# Altium PCB Control_Board_Model_C201_FFC_Sens_Conn.PcbDoc (part 8 of 12)
Units mil, origin at the board's own origin, x right, y up, seen from the top; angles counter-clockwise.
Board outline 3937.01 x 2755.91 mil, 6 copper layers (1-SIG-TOP, 2-GND, 3-PWR, 4-SIG-HOR, 5-SIG-VERT, 6-GND-BOT), stack 46.063 mil thick; 497 components, 379 nets, 1804 pads, 1610 vias.
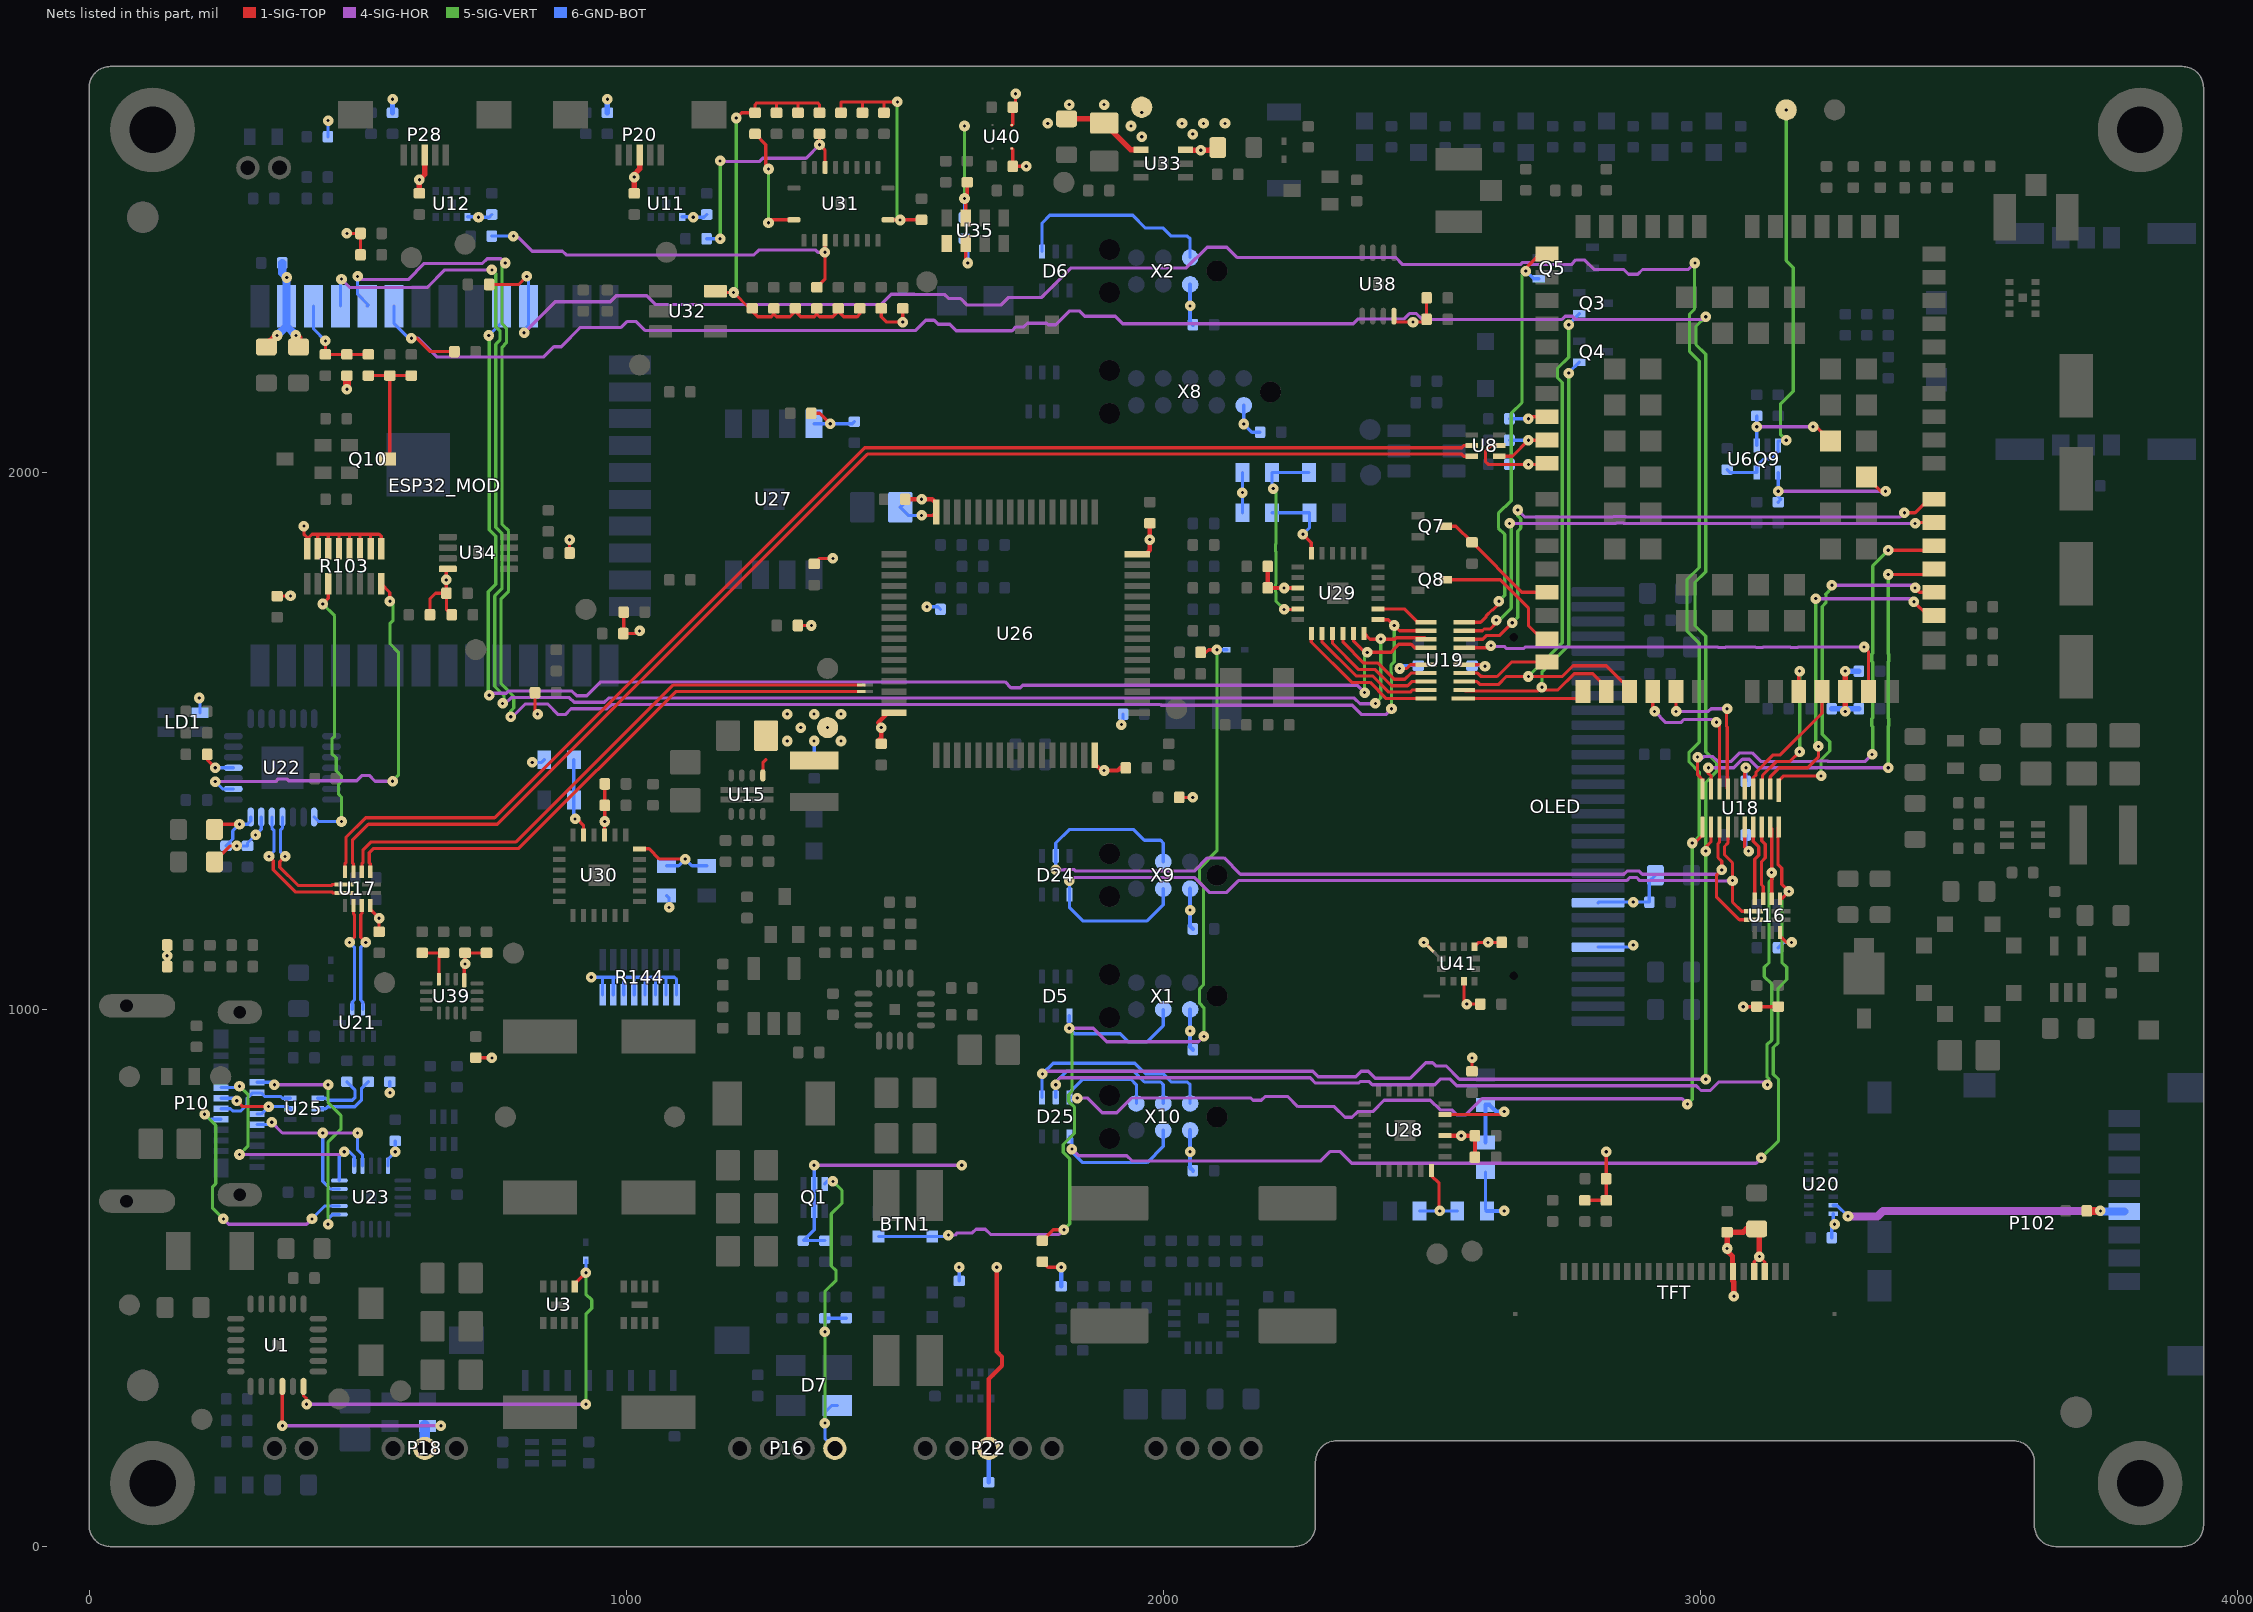
[diagram p8: the nets of this part, all layers, seen from the top]

## Part data (continued)
U13: library part "IC STSPIN220 MOTOR DRVR BIPOLAR 0-5V 16FPN", "Bipolar Motor Driver Power MOSFET Step/Direction 16-VFQFPN (3x3)", Manufacturer=STMicroelectronics, Max Operating Temperature=150°C, Min Operating Temperature=-40°C, Output Current=1.3A, Supplier Part Number 1=497-16602-1-ND, ComponentLink1Description=http://www.st.com/content/ccc/resource/technical/document/datasheet/group3/42/7e/5c/90/70/ef/47/95/DM00291865/files/DM00291865.pdf/jcr:content/translations/en.DM00291865.pdf?src-supplier=Digi-Key, ComponentLink1URL=http://www.st.com/content/ccc/resource/technical/document/datasheet/group3/42/7e/5c/90/70/ef/47/95/DM00291865/files/DM00291865.pdf/jcr:content/translations/en.DM00291865.pdf?src-supplier=Digi-Key, ComponentLink2Description=http://www.farnell.com/datasheets/2815804.pdf?src-supplier=Newark, ComponentLink2URL=http://www.farnell.com/datasheets/2815804.pdf?src-supplier=Newark, ComponentLink3Description=http://www.farnell.com/datasheets/2815804.pdf?src-supplier=Farnell, ComponentLink3URL=http://www.farnell.com/datasheets/2815804.pdf?src-supplier=Farnell, Logic Function=AND, Manufacturer Part Number=STSPIN220, Mount="Surface Mount", Packaging="Cut Tape", Pricing 1="1=1.62, 10=1.458, 25=1.3752, 100=1.1, 250=0.9625, 500=0.935, 1000=0.7425 (USD)", Stock 1=3586, Supplier 1=Digi-Key
U14: library part "IC TPS61023DRLT REG BOOST ADJ 3A SOT563", "Boost Switching Regulator IC Positive Adjustable 2.2V 1 Output 3A SOT-563, SOT-666", Input Voltage="0.5 V to 5.5 V", Input Voltage MAX="5.5 V", Input Voltage MIN="0.5 V", Manufacturer="Texas Instruments", Maximum Operating Temperature="+ 125 C", Minimum Operating Temperature="- 40 C", Output Current="3.7 A", Output Voltage="2.2 V to 5.5 V", Package / Case=SOT-5X3-6, Quiescent Current="0.9 uA", Supplier Part Number 1=595-TPS61023DRLT, Switching Frequency="1 MHz", Brand="Texas Instruments", Category="Switching Voltage Regulators", Development Kit=TPS61023EVM-052, Height="0.55 mm", Length="1.6 mm", Manufacturer Part Number=TPS61023DRLT, Minimum Order Quantity=1, Mount="Surface Mount", Mounting Style=SMD/SMT, Number of Outputs="1 Output", Packaging="Cut Tape", Pricing 1="1=1.07, 10=0.902, 100=0.693, 250=0.612, 500=0.580, 1000=0.451, 2500=0.429, 5000=0.413, 10000=0.400 (USD)", Product Status="New Product", Product Type="Switching Voltage Regulators", Reeling=True, RoHS="RoHS Compliant", RoHS - Mouser=Y, Series=TPS61023, Shutdown=Shutdown, Standard Pack Qty=250, Stock 1=196, Subcategory="PMIC - Power Management ICs", Supplier 1=Mouser, Supplier 2=Digi-Key, Supplier Part Number 2=296-TPS61023DRLTCT-ND, Supply Voltage - Min="0.5 V", Topology=Boost, Width="1.2 mm"
U15: library part "IC TPS6209733 REG BUCK FIXED 3.3V 2A 11VQFN", "Buck Switching Regulator IC Positive Fixed 3.3V 1 Output 2A 11-VFQFN", Case/Package=VQFN, Manufacturer="Texas Instruments", Max Input Voltage=6V, Max Operating Temperature=125°C, Min Input Voltage=2.5V, Min Operating Temperature=-40°C, Min Output Voltage=3.3V, Output Current=2A, Quiescent Current=40uA, Supplier Part Number 1=296-49007-1-ND, Switching Frequency=2.5MHz, ComponentLink1Description=http://www.ti.com/lit/gpn/tps62097?src-supplier=Mouser, ComponentLink1URL=http://www.ti.com/lit/gpn/tps62097?src-supplier=Mouser, ComponentLink2Description=http://www.ti.com/lit/ds/symlink/tps62097.pdf?src-supplier=Digi-Key, ComponentLink2URL=http://www.ti.com/lit/ds/symlink/tps62097.pdf?src-supplier=Digi-Key, Lead Free="Lead Free", Manufacturer Part Number=TPS6209733RWKR, Mount="Surface Mount", Number of Outputs=1, Number of Pins=11, Output Configuration=Positive, Output Type=Fixed, Packaging="Tape and Reel", Pricing 1="1=1.74, 10=1.561, 100=1.1783, 500=1.0016, 1000=0.7954 (USD)", Stock 1=1536, Supplier 1=Digi-Key, Synchronous Rectifier=Yes
U16 U17: library part "IC TS3USB3031 USB SWITCH DUAL 1X2 12WQFN", "USB Switch IC 1 Channel 12-WQFN (1.8x1.8)", Manufacturer="Texas Instruments", Maximum Operating Temperature="+ 85 C", Minimum Operating Temperature="- 40 C", On Resistance - Max="7 Ohms", Operating Supply Current="40 uA", Operating Supply Voltage="2.5 V", Package / Case=WQFN-12, Supplier Part Number 1=595-TS3USB3031RMGR, Supply Voltage - Max="4.3 V", Switch Continuous Current="60 mA", Bandwidth="6.5 GHz", Brand="Texas Instruments", Category="USB Switch ICs", ComponentLink1Description="Data sheet", ComponentLink1URL=https://www.ti.com/lit/gpn/ts3usb3031, Configuration="1 x DP3T", Development Kit=TS3USB3031EVM, Manufacturer Part Number=TS3USB3031RMGR, Minimum Order Quantity=1, Mount="Surface Mount", Mounting Style=SMD/SMT, Number of Switches="2 Switch", Off Time - Max="0.1 ns", On Time - Max="100 us", Packaging="Cut Tape", Pricing 1="1=1.16, 10=0.980, 100=0.753, 250=0.666, 500=0.630, 1000=0.490, 3000=0.466, 6000=0.448, 9000=0.434 (USD)", Product="USB 2.0, MHL, MyDP Switches", Product Type="USB Switch ICs", Reeling=True, RoHS="RoHS Compliant", RoHS - Mouser=Y, Series=TS3USB3031, Standard Pack Qty=3000, Stock 1=14547, Subcategory="Switch ICs", Supplier 1=Mouser, Supplier 2=Digi-Key, Supplier Part Number 2=296-41018-1-ND, Supply Voltage - Min="2.5 V"
U18 U19: library part "IC TXB0108 TRNSLTR BIDIRECTIONAL 20USON", "Voltage Level Translator Bidirectional 1 Circuit 8 Channel 100Mbps 20-USON (4x2)", High Level Output Current=-20uA, Low Level Output Current=20uA, Manufacturer="Texas Instruments", Max Operating Temperature=85°C, Max Supply Voltage=5.5V, Min Operating Temperature=-40°C, Min Supply Voltage=1.2V, Package Quantity=1, Quiescent Current=3.5uA, Supplier Part Number 1=296-27217-1-ND, ComponentLink1Description=http://www.ti.com/general/docs/lit/getliterature.tsp?genericPartNumber=TXB0108&amp;&amp;fileType=pdf&src-supplier=Element14, ComponentLink1URL=http://www.ti.com/general/docs/lit/getliterature.tsp?genericPartNumber=TXB0108&amp;&amp;fileType=pdf&src-supplier=Element14, ComponentLink2Description=http://www.ti.com/general/docs/suppproductinfo.tsp?distId=10&gotoUrl=http%3A%2F%2Fwww.ti.com%2Flit%2Fgpn%2Ftxb0108&src-supplier=Digi-Key, ComponentLink2URL=http://www.ti.com/general/docs/suppproductinfo.tsp?distId=10&gotoUrl=http%3A%2F%2Fwww.ti.com%2Flit%2Fgpn%2Ftxb0108&src-supplier=Digi-Key, ComponentLink3Description=http://www.ti.com/lit/ds/symlink/txb0108.pdf?src-supplier=Avnet+Europe, ComponentLink3URL=http://www.ti.com/lit/ds/symlink/txb0108.pdf?src-supplier=Avnet+Europe, ComponentLink4Description=http://www.ti.com/general/docs/lit/getliterature.tsp?genericPartNumber=TXB0108&&fileType=pdf&src-supplier=Avnet, ComponentLink4URL=http://www.ti.com/general/docs/lit/getliterature.tsp?genericPartNumber=TXB0108&&fileType=pdf&src-supplier=Avnet, Data Rate=100Mbps, Lead Free="Lead Free", Logic Function=Translator, Manufacturer Part Number=TXB0108DQSR, Mount="Surface Mount", Number of Bits=8, Number of Channels=8, Number of Inputs=8, Number of Pins=20, Packaging="Tape and Reel", Pricing 1="1=1.29, 10=1.151, 25=1.092, 100=0.897, 250=0.8385, 500=0.741, 1000=0.585 (USD)", Propagation Delay=4ns, Radiation Hardening=No, REACH SVHC="No SVHC", Stock 1=18752, Supplier 1=Digi-Key, Turn-On Delay Time=35.6ns
U20: library part "FILTER RC(PI) 45 OHM/20PF SMD", "RC (Pi) EMI Filter 2nd Order Low Pass 6 Channel R = 45Ohms, C = 20pF (Total)  16-UFDFN Exposed Pad", Breakdown Voltage=8V, Capacitance=20pF, Case/Package=QFN, Manufacturer=STMicroelectronics, Max Operating Temperature=85°C, Min Operating Temperature=-30°C, Package Quantity=1, Supplier Part Number 1=497-8751-1-ND, ComponentLink1Description=http://www.st.com/content/ccc/resource/technical/document/datasheet/a7/86/d3/98/2c/7f/4b/d2/CD00217829.pdf/files/CD00217829.pdf/jcr:content/translations/en.CD00217829.pdf?src-supplier=Digi-Key, ComponentLink1URL=http://www.st.com/content/ccc/resource/technical/document/datasheet/a7/86/d3/98/2c/7f/4b/d2/CD00217829.pdf/files/CD00217829.pdf/jcr:content/translations/en.CD00217829.pdf?src-supplier=Digi-Key, ComponentLink2Description=https://www.verical.com/server-webapp/html/getDatasheet?partID=558558&src-supplier=Verical, ComponentLink2URL=https://www.verical.com/server-webapp/html/getDatasheet?partID=558558&src-supplier=Verical, ComponentLink3Description=http://www.st.com/web/en/resource/technical/document/datasheet/CD00217829.pdf?src-supplier=Mouser, ComponentLink3URL=http://www.st.com/web/en/resource/technical/document/datasheet/CD00217829.pdf?src-supplier=Mouser, Contact Plating=Gold, Depth=1.25mm, ESD Protection=Yes, Height=0.022inch, Lead Free="Lead Free", Length=3.55mm, Manufacturer Part Number=EMIF06-MSD02N16, Max Breakdown Voltage=8V, Mount="Surface Mount", Number of Channels=6, Number of Pins=16, Packaging="Tape and Reel", Pricing 1="1=0.95, 10=0.904, 25=0.8752, 50=0.7148, 100=0.6418, 250=0.5834, 500=0.5543, 1000=0.4959 (USD)", Radiation Hardening=No, REACH SVHC="No SVHC", Stock 1=3881, Supplier 1=Digi-Key, Termination=Flat, Width=0.047inch
U21: library part "IC BQ24392RSER CHARGE DETECT HS USB 10UQFN", "Battery Multi-Function Controller IC  10-UQFN (2.0x1.5)", Manufacturer="Texas Instruments", Max Operating Temperature=85°C, Max Supply Voltage=5.25V, Min Operating Temperature=-40°C, Min Supply Voltage=4.75V, On-State Resistance=8R, Operating Supply Voltage=5V, Package Quantity=3000, Supplier Part Number 1=296-37689-1-ND, Bandwidth=920MHz, ComponentLink1Description=http://www.ti.com/general/docs/lit/getliterature.tsp?genericPartNumber=BQ24392&&fileType=pdf&src-supplier=Avnet, ComponentLink1URL=http://www.ti.com/general/docs/lit/getliterature.tsp?genericPartNumber=BQ24392&&fileType=pdf&src-supplier=Avnet, ComponentLink2Description=https://www.verical.com/server-webapp/html/getDatasheet?partID=543706&src-supplier=Verical, ComponentLink2URL=https://www.verical.com/server-webapp/html/getDatasheet?partID=543706&src-supplier=Verical, ComponentLink3Description=http://www.ti.com/lit/ds/slis146a/slis146a.pdf?src-supplier=Avnet+Europe, ComponentLink3URL=http://www.ti.com/lit/ds/slis146a/slis146a.pdf?src-supplier=Avnet+Europe, ComponentLink4Description=http://www.farnell.com/datasheets/2020408.pdf?src-supplier=Element14, ComponentLink4URL=http://www.farnell.com/datasheets/2020408.pdf?src-supplier=Element14, ComponentLink5Description=http://www.ti.com/lit/gpn/bq24392?src-supplier=Mouser, ComponentLink5URL=http://www.ti.com/lit/gpn/bq24392?src-supplier=Mouser, Contact Plating=Gold, Interface=USB, Lead Free="Lead Free", Length=1.5mm, Manufacturer Part Number=BQ24392RSER, Mount="Surface Mount", Number of Channels=2, Number of Pins=10, Packaging="Tape and Reel", Pricing 1="1=0.89, 10=0.797, 25=0.756, 100=0.5805, 250=0.513, 500=0.486, 1000=0.378 (USD)", Radiation Hardening=No, REACH SVHC="No SVHC", Stock 1=7267, Supplier 1=Digi-Key, Weight=0.000353oz
U22: library part "IC CP2102N USB TO UART BRIDGE QFN28", "USB Bridge, USB to UART USB 2.0 UART Interface 28-QFN (5x5)", Manufacturer="Silicon Labs", Supplier Part Number 1=336-5890-1-ND, ComponentLink1Description=https://4donline.ihs.com/images/VipMasterIC/IC/SILC/SILC-S-A0007770867/SILC-S-A0007770867-1.pdf?hkey=6D3A4C79FDBF58556ACFDE234799DDF0&src-supplier=Farnell, ComponentLink1URL=https://4donline.ihs.com/images/VipMasterIC/IC/SILC/SILC-S-A0007770867/SILC-S-A0007770867-1.pdf?hkey=6D3A4C79FDBF58556ACFDE234799DDF0&src-supplier=Farnell, Manufacturer Part Number=CP2102N-A02-GQFN28R, Mount="Surface Mount", Pricing 1="1=1.4, 25=1.3516, 100=1.2995 (USD)", Stock 1=3461, Supplier 1=Digi-Key
U23: library part "IC TPD6S300A USB-C ESD PROTECTION", "USB Type-C™ Port Protector: Short-to-VBUS Overvoltage  and IEC ESD Protection", Manufacturer="Texas Instruments", Maximum Operating Temperature="+ 85 C", Minimum Operating Temperature="- 40 C", Operating Supply Current="600 mA", Operating Supply Voltage="3.3 V", Package / Case=WQFN-20, Supplier Part Number 1=595-TPD6S300ARUKR, Supply Voltage - Max="3.6 V", Supply Voltage - Min="2.7 V", Brand="Texas Instruments", Category="USB Interface IC", Data Rate=-, ESD Protection="ESD Protection", Interface Type=USB, Manufacturer Part Number=TPD6S300ARUKR, Minimum Order Quantity=1, Moisture Sensitive=Yes, Mount="Surface Mount", Mounting Style=SMD/SMT, Packaging="Cut Tape", Pricing 1="1=1.31, 10=1.11, 100=0.852, 500=0.753, 1000=0.594, 3000=0.555, 6000=0.527, 9000=0.507 (USD)", Product="USB Protectors", Product Type="USB Interface IC", Reeling=True, RoHS="RoHS Compliant", RoHS - Mouser=Y, Series=TPD6S300A, Speed="Super Speed", Standard="USB-C 2.0", Standard Pack Qty=3000, Stock 1=6078, Subcategory="Interface ICs", Supplier 1=Mouser, Supplier 2=Digi-Key, Supplier Part Number 2=296-51856-1-ND
U24: library part "IC TPS61169 WLED BACKLIGHT DRIVER SC70-5", "LED Driver IC 1 Output DC DC Regulator Step-Up (Boost) PWM Dimming 1.8A (Switch) SC-70-5", Case/Package=SC, Frequency=1.2MHz, Manufacturer="Texas Instruments", Max Input Voltage=5.5V, Max Operating Temperature=85°C, Max Output Current=2.4A, Max Output Voltage=38V, Min Input Voltage=2.7V, Min Operating Temperature=-40°C, Nominal Input Voltage (DC)=3.6V, Output Current=400mA, Output Current per Channel=1.8A, Package Quantity=3000, Supplier Part Number 1=296-40821-1-ND, ComponentLink1Description=http://www.ti.com/general/docs/lit/getliterature.tsp?genericPartNumber=TPS61169&&fileType=pdf&src-supplier=Element14, ComponentLink1URL=http://www.ti.com/general/docs/lit/getliterature.tsp?genericPartNumber=TPS61169&&fileType=pdf&src-supplier=Element14, ComponentLink2Description=http://www.ti.com/general/docs/lit/getliterature.tsp?genericPartNumber=TPS61169&amp;&amp;fileType=pdf&src-supplier=Farnell, ComponentLink2URL=http://www.ti.com/general/docs/lit/getliterature.tsp?genericPartNumber=TPS61169&amp;&amp;fileType=pdf&src-supplier=Farnell, ComponentLink3Description=http://www.ti.com/lit/ds/symlink/tps61169.pdf?src-supplier=Digi-Key, ComponentLink3URL=http://www.ti.com/lit/ds/symlink/tps61169.pdf?src-supplier=Digi-Key, ComponentLink4Description=http://www.ti.com/general/docs/lit/getliterature.tsp?genericPartNumber=TPS61169&&fileType=pdf&src-supplier=Avnet, ComponentLink4URL=http://www.ti.com/general/docs/lit/getliterature.tsp?genericPartNumber=TPS61169&&fileType=pdf&src-supplier=Avnet, ComponentLink5Description=http://www.ti.com/lit/gpn/tps61169?src-supplier=Mouser, ComponentLink5URL=http://www.ti.com/lit/gpn/tps61169?src-supplier=Mouser, Contact Plating=Gold, Dimming=PWM, Height=1.1mm, Lead Free="Lead Free", Length=2mm, Manufacturer Part Number=TPS61169DCKR, Max Input Voltage (DC)=5.5V, Max Supply Voltage=5.5V, Min Output Voltage=2.7V, Mount="Surface Mount", Number of Channels=1, Number of Outputs=1, Number of Pins=5, Output Type=Frequency, Output Voltage=38V, Packaging="Tape and Reel", Pricing 1="1=0.9, 10=0.805, 25=0.7644, 100=0.587, 250=0.5187, 500=0.4914, 1000=0.3822 (USD)", REACH SVHC="No SVHC", Stock 1=112915, Supplier 1=Digi-Key, Switching Frequency=1.2MHz, Topology=Boost, Weight=0.000705oz, Width=1.25mm
U26: library part "IC STM32G473RETx LQFP64", "ARM® Cortex®-M4 STM32G4 Microcontroller IC 32-Bit 170MHz 512KB (512K x 8) FLASH 64-LQFP (10x10)", Analog Supply Voltage="1.62 V to 3.6 V", I/O Voltage="5 V", Manufacturer=STMicroelectronics, Maximum Clock Frequency="170 MHz", Maximum Operating Temperature="+ 85 C", Minimum Operating Temperature="- 40 C", Operating Supply Voltage="1.71 V to 3.6 V", Package / Case=LQFP-64, Supplier Part Number 1=511-STM32G473RET6, Supply Voltage - Max="3.6 V", Supply Voltage - Min="1.71 V", ADC Resolution="12 bit", Brand=STMicroelectronics, Category="ARM Microcontrollers - MCU", ComponentLink1Description=https://www.mouser.com/datasheet/2/389/dm00528822-1799294.pdf, ComponentLink1URL=https://www.mouser.com/datasheet/2/389/dm00528822-1799294.pdf, Core="ARM Cortex M4", DAC Resolution="12 bit", Data Bus Width="32 bit", Data RAM Size="128 kB", Data RAM Type=SRAM, Interface Type="I2C, SPI, UART, USART, USB", Manufacturer Part Number=STM32G473RET6, Minimum Order Quantity=1, Moisture Sensitive=Yes, Mount="Surface Mount", Mounting Style=SMD/SMT, Number of ADC Channels="26 Channel", Number of I/Os="52 I/O", Packaging=Tray, Pricing 1="1=7.73, 10=6.99, 25=6.66, 100=5.79, 250=5.53, 500=5.04, 1000=4.54, 2500=4.22 (USD)", Processor Series=STM32G473, Product=MCU+FPU, Product Status="New Product", Product Type="ARM Microcontrollers - MCU", Program Memory Size="512 kB", Program Memory Type=Flash, Reeling=False, RoHS="RoHS Compliant", RoHS - Mouser=Y, Series=STM32G473RE, Standard Pack Qty=960, Stock 1=313, Subcategory="Microcontrollers - MCU", Supplier 1=Mouser, Supplier 2=Digi-Key, Supplier Part Number 2=497-STM32G473RET6-ND, Tradename=STM32, Watchdog Timers="Watchdog Timer, Windowed"
U27: library part "IC MT25QL256 FLASH 256M SPI 133MHZ 8WPDFN", "256Mb, 3V, Multiple I/O Serial Flash Memory, Quad/Dual", Frequency=133MHz, Manufacturer="Micron Technology", Max Operating Temperature=85°C, Min Operating Temperature=-40°C, Supplier Part Number 1=557-1984-1-ND, ComponentLink1Description=https://www.micron.com/~/media/documents/products/data-sheet/nor-flash/serial-nor/mt25q/die-rev-a/mt25q_qljs_l_256_aba_0.pdf?src-supplier=Digi-Key, ComponentLink1URL=https://www.micron.com/~/media/documents/products/data-sheet/nor-flash/serial-nor/mt25q/die-rev-a/mt25q_qljs_l_256_aba_0.pdf?src-supplier=Digi-Key, Manufacturer Part Number="MT25QL256ABA1EW9-0SIT TR", Memory Size=256Mb, Memory Type=Non-Volatile,FLASH, Mount="Surface Mount", Packaging="Cut Tape", Pricing 1="1=3.45, 10=3.129, 25=3.0612, 50=3.0442, 100=2.7301, 250=2.72, 500=2.6198, 1000=2.4908 (USD)", Stock 1=3545, Supplier 1=Digi-Key
U28 U29 U30: library part "IC PCAL9539AHF,128 I/O EXPANDER 16BIT 24HWQFN", "I/O Expander with interrupt and reset 16 I²C 400kHz 24-HWQFN (4x4)", Input Voltage="1.65 V to 5.5 V", Manufacturer="NXP Semiconductors", Maximum Clock Frequency="100 kHz", Maximum Operating Temperature="+ 85 C", Minimum Operating Temperature="- 40 C", Operating Supply Current="160 mA", Output Current="25 mA", Output Voltage="6.5 V", Package / Case=HWQFN-24, Pd - Power Dissipation="200 mW", Supplier Part Number 1=771-PCAL9539AHF,128, 7B_I2C_ADDR="0b11101XX (0x74..0x77)", Brand="NXP Semiconductors", Category="Interface - I/O Expanders", ComponentLink1Description=https://www.mouser.com/datasheet/2/302/PCAL9539A-1127729.pdf, ComponentLink1URL=https://www.mouser.com/datasheet/2/302/PCAL9539A-1127729.pdf, Logic Type="I2C, SMBus", Manufacturer Part Number=PCAL9539AHF,128, Minimum Order Quantity=1, Mount="Surface Mount", Mounting Style=SMD/SMT, Operating Supply Voltage="1.65 V to 5.5 V", Packaging="Cut Tape", Pricing 1="1=2.11, 10=1.79, 100=1.25, 500=1.21, 1000=0.968, 2500=0.932, 6000=0.896 (USD)", Product="I/O Expanders", Product Type="I/O Expanders", Reeling=True, RoHS="RoHS Compliant", RoHS - Mouser=Y, Standard Pack Qty=6000, Stock 1=4265, Subcategory="Interface ICs", Supplier 1=Mouser, Type="I/O Expander"
U31: library part "IC PCA9545A I2C SW 4CH W/RESET 20VQFN", "4-Channel I2C And SMBus Multiplexer With Interrupt Logic And Reset Functions", Case/Package="VQFN EP", Manufacturer="Texas Instruments", Max Frequency=400kHz, Max Operating Temperature=85°C, Max Power Dissipation=400mW, Max Supply Voltage=5.5V, Min Operating Temperature=-40°C, Min Supply Voltage=2.3V, On-State Resistance=45R, Operating Supply Current=8uA, Package Quantity=1, Supplier Part Number 1=296-20964-1-ND, Bandwidth=400kHz, ComponentLink1Description=http://www.ti.com/lit/ds/symlink/pca9545a.pdf?src-supplier=Digi-Key, ComponentLink1URL=http://www.ti.com/lit/ds/symlink/pca9545a.pdf?src-supplier=Digi-Key, ComponentLink2Description=http://www.ti.com/general/docs/lit/getliterature.tsp?genericPartNumber=PCA9545A&&fileType=pdf&src-supplier=Avnet, ComponentLink2URL=http://www.ti.com/general/docs/lit/getliterature.tsp?genericPartNumber=PCA9545A&&fileType=pdf&src-supplier=Avnet, ComponentLink3Description=https://www.verical.com/server-webapp/html/getDatasheet?partID=164589&src-supplier=Verical, ComponentLink3URL=https://www.verical.com/server-webapp/html/getDatasheet?partID=164589&src-supplier=Verical, ComponentLink4Description=http://www.produktinfo.conrad.com/datenblaetter/1100000-1199999/001188020-da-01-en-IC_I2C_SMBUS_SW_PCA9545ARGYR_VQFN_20_TID.pdf?src-supplier=Conrad, ComponentLink4URL=http://www.produktinfo.conrad.com/datenblaetter/1100000-1199999/001188020-da-01-en-IC_I2C_SMBUS_SW_PCA9545ARGYR_VQFN_20_TID.pdf?src-supplier=Conrad, Lead Free="Lead Free", Logic Function=Multiplexer, Manufacturer Part Number=PCA9545ARGYR, Mount="Surface Mount", Number of Channels=4, Number of Circuits=4, Number of Inputs=4, Number of Outputs=1, Number of Pins=20, Packaging="Tape and Reel", Power Dissipation=400mW, Pricing 1="1=1.95, 10=1.749, 25=1.65, 100=1.32, 250=1.155, 500=1.122, 1000=0.891 (USD)", Propagation Delay=1ns, Radiation Hardening=No, Stock 1=3156, Supplier 1=Digi-Key, Throw Configuration=4PST, Weight=0.001517oz
U32: library part "IC 24LC00T-I/OT EEPROM 128 I2C SOT23-5", "EEPROM Memory IC 128b (16 x 8) I²C 400kHz 3500ns SOT-23-5", Case/Package=SOT-23, Frequency=400kHz, Manufacturer=Microchip, Max Operating Temperature=85°C, Max Supply Voltage=5.5V, Min Operating Temperature=-40°C, Min Supply Voltage=2.5V, Nominal Supply Current=2mA, Package Quantity=3000, Supplier Part Number 1=24LC00T-I/OTCT-ND, Access Time=900ns, ComponentLink1Description=http://www.farnell.com/datasheets/1669367.pdf?src-supplier=Element14, ComponentLink1URL=http://www.farnell.com/datasheets/1669367.pdf?src-supplier=Element14, ComponentLink2Description=http://ww1.microchip.com/downloads/en/DeviceDoc/21178H.pdf?src-supplier=Avnet+Europe, ComponentLink2URL=http://ww1.microchip.com/downloads/en/DeviceDoc/21178H.pdf?src-supplier=Avnet+Europe, ComponentLink3Description=http://www.microchip.com/mymicrochip/filehandler.aspx?ddocname=en011773&src-supplier=Future+Electronics, ComponentLink3URL=http://www.microchip.com/mymicrochip/filehandler.aspx?ddocname=en011773&src-supplier=Future+Electronics, ComponentLink4Description=https://www.distrelec.biz/Web/Downloads/_t/ds/24AA00_24LC00_24C00_eng_tds.pdf?mime=application%2Fpdf&src-supplier=Distrelec, ComponentLink4URL=https://www.distrelec.biz/Web/Downloads/_t/ds/24AA00_24LC00_24C00_eng_tds.pdf?mime=application%2Fpdf&src-supplier=Distrelec, ComponentLink5Description=https://www.verical.com/server-webapp/html/getDatasheet?partID=790518&src-supplier=Verical, ComponentLink5URL=https://www.verical.com/server-webapp/html/getDatasheet?partID=790518&src-supplier=Verical, ComponentLink6Description=http://www.produktinfo.conrad.com/datenblaetter/1000000-1099999/001085284-da-01-en-IC_EEPROM_128B_24LC00T_I_OT_SOT_23_5_MCP.pdf?src-supplier=Conrad, ComponentLink6URL=http://www.produktinfo.conrad.com/datenblaetter/1000000-1099999/001085284-da-01-en-IC_EEPROM_128B_24LC00T_I_OT_SOT_23_5_MCP.pdf?src-supplier=Conrad, Contact Plating=Tin,Matte, Density=128b, Height=1.3mm, Interface=I2C,2-Wire,Serial, Lead Free="Lead Free", Length=3.1mm, Manufacturer Part Number=24LC00T-I/OT, Max Frequency=400kHz, Memory Size=128b, Memory Type=EEPROM, Mount="Surface Mount", Number of Pins=5, Packaging="Tape and Reel", Pricing 1="1=0.19, 100=0.1785 (USD)", Radiation Hardening=No, REACH SVHC="No SVHC", Stock 1=29747, Supplier 1=Digi-Key, Width=1.8mm
U33: library part "IC TPS22810DRVT PWR SWITCH N-CHAN 1:1 6WSON", "TPS22810, 2.7-18-V, 79-mOhm On-Resistance Load Switch With Thermal Protection", Manufacturer="Texas Instruments", Max Operating Temperature=105°C, Max Output Current=3A, Min Operating Temperature=-40°C, Supplier Part Number 1=296-46947-1-ND, ComponentLink1Description=http://www.ti.com/lit/ds/symlink/tps22810.pdf?src-supplier=Digi-Key, ComponentLink1URL=http://www.ti.com/lit/ds/symlink/tps22810.pdf?src-supplier=Digi-Key, ComponentLink2Description=http://www.ti.com/general/docs/lit/getliterature.tsp?genericPartNumber=TPS22810&fileType=pdf&src-supplier=Farnell, ComponentLink2URL=http://www.ti.com/general/docs/lit/getliterature.tsp?genericPartNumber=TPS22810&fileType=pdf&src-supplier=Farnell, Fault Protection="Over Temperature", Interface=On/Off, Manufacturer Part Number=TPS22810DRVT, Mount="Surface Mount", Number of Channels=1, Number of Outputs=1, Output Configuration="High Side", Packaging="Tape and Reel", Pricing 1="1=0.66, 10=0.581, 25=0.5456, 100=0.4136 (USD)", Stock 1=5029, Supplier 1=Digi-Key
U34: library part "IC ATECC608A-MAHDA-S AUTHENTICATION CHIP 8UDFN", "Authentication Chip 8-UDFN (2x3)", Manufacturer=Microchip, Supplier Part Number 1=ATECC608A-MAHDA-SCT-ND, ComponentLink1Description=http://ww1.microchip.com/downloads/en/DeviceDoc/40001977A.pdf?src-supplier=Farnell, ComponentLink1URL=http://ww1.microchip.com/downloads/en/DeviceDoc/40001977A.pdf?src-supplier=Farnell, ComponentLink2Description=http://ww1.microchip.com/downloads/en/DeviceDoc/40001977A.pdf?src-supplier=Newark, ComponentLink2URL=http://ww1.microchip.com/downloads/en/DeviceDoc/40001977A.pdf?src-supplier=Newark, ComponentLink3Description=http://ww1.microchip.com/downloads/en/DeviceDoc/40001977A.pdf?src-supplier=Element14, ComponentLink3URL=http://ww1.microchip.com/downloads/en/DeviceDoc/40001977A.pdf?src-supplier=Element14, ComponentLink4Description=http://www.microchip.com/mymicrochip/filehandler.aspx?ddocname=en601565&src-supplier=Digi-Key, ComponentLink4URL=http://www.microchip.com/mymicrochip/filehandler.aspx?ddocname=en601565&src-supplier=Digi-Key, Manufacturer Part Number=ATECC608A-MAHDA-S, Mount="Surface Mount", Packaging="Cut Tape", Pricing 1="1=0.75, 25=0.7244, 100=0.6563 (USD)", Stock 1=2773, Supplier 1=Digi-Key
U35: library part "IC RV-3028 RTC CLK/CALENDAR I2C 8-SMT", "2-Bit Bidirectional Voltage-Level Translator for Open-Drain Application", Manufacturer="Micro Crystal", Supplier Part Number 1=2195-RV-3028-C732.768KHZ1PPM-TA-QCCT-ND, Manufacturer Part Number="RV-3028-C7 32.768KHZ 1PPM-TA-QC", Mount="Surface Mount", Pricing 1="1=2.71, 10=2.435, 25=2.3016, 100=1.9949, 250=1.8926, 500=1.6982 (USD)", Stock 1=4121, Supplier 1=Digi-Key
U36: library part "IC TPS55340RTET REG BOOST ADJ 5.25A 16WQFN", "Boost Switching Regulator IC Positive, Isolation Capable Adjustable 2.9V 1 Output 5.25A (Switch) 16-WFQFN Exposed Pad", Manufacturer="Texas Instruments", Max Input Voltage=32V, Max Operating Temperature=150°C, Max Output Current=5A, Max Output Voltage=38V, Min Input Voltage=2.9V, Min Operating Temperature=-40°C, Package Quantity=1, Quiescent Current=500uA, Supplier Part Number 1=296-30530-1-ND, Switching Frequency=1.14MHz, ComponentLink1Description=http://www.ti.com/general/docs/lit/getliterature.tsp?genericPartNumber=TPS55340&amp;&amp;fileType=pdf&src-supplier=Newark, ComponentLink1URL=http://www.ti.com/general/docs/lit/getliterature.tsp?genericPartNumber=TPS55340&amp;&amp;fileType=pdf&src-supplier=Newark, ComponentLink2Description=http://www.ti.com/general/docs/lit/getliterature.tsp?genericPartNumber=TPS55340&&fileType=pdf&src-supplier=Avnet, ComponentLink2URL=http://www.ti.com/general/docs/lit/getliterature.tsp?genericPartNumber=TPS55340&&fileType=pdf&src-supplier=Avnet, ComponentLink3Description=http://www.farnell.com/datasheets/2019229.pdf?src-supplier=Element14, ComponentLink3URL=http://www.farnell.com/datasheets/2019229.pdf?src-supplier=Element14, ComponentLink4Description=http://www.ti.com/lit/ds/symlink/tps55340.pdf?src-supplier=Avnet+Europe, ComponentLink4URL=http://www.ti.com/lit/ds/symlink/tps55340.pdf?src-supplier=Avnet+Europe, Height=0.72mm, Lead Free="Lead Free", Length=3.15mm, Manufacturer Part Number=TPS55340RTET, Min Output Voltage=2.9V, Mount="Surface Mount", Number of Outputs=1, Number of Pins=16, Output Current=5A, Output Type=Adjustable, Output Voltage=38V, Packaging="Tape and Reel", Pricing 1="1=3.76, 10=3.372, 25=3.1884, 100=2.6215 (USD)", Radiation Hardening=No, REACH SVHC="No SVHC", Stock 1=6832, Supplier 1=Digi-Key, Synchronous Rectifier=No, Topology=Boost,Flyback,SEPIC, Width=3.15mm
U37: library part "IC OPA171 OPAMP GP 1 CIRCUIT SOT-23-5", "General Purpose Amplifier 1 Circuit Rail-to-Rail SOT-23-5", Case/Package=SOT-23-5, Input Bias Current=15pA, Input Offset Voltage (Vos)=250uV, Manufacturer="Texas Instruments", Max Dual Supply Voltage=18V, Max I/O Voltage=1.8mV, Max Operating Temperature=125°C, Max Supply Voltage=36V, Min Dual Supply Voltage=1.35V, Min Operating Temperature=-40°C, Min Supply Voltage=2.7V, Nominal Supply Current=475uA, Output Current=25mA, Output Current per Channel=35mA, Package Quantity=3000, Power Supply Rejection Ratio (PSRR)=120dB, Supplier Part Number 1=296-37698-1-ND, Voltage Gain=130dB, Bandwidth=3MHz, Common Mode Rejection Ratio=104dB, ComponentLink1Description=http://www.ti.com/lit/ds/symlink/opa171.pdf?src-supplier=Digi-Key, ComponentLink1URL=http://www.ti.com/lit/ds/symlink/opa171.pdf?src-supplier=Digi-Key, Contact Plating=Gold, Gain Bandwidth Product=3MHz, Lead Free="Lead Free", Manufacturer Part Number=OPA171AIDBVR, Mount="Surface Mount", Nominal Gain Bandwidth Product=3MHz, Number of Amplifiers=1, Number of Channels=1, Number of Circuits=1, Number of Elements=1, Number of Pins=5, Operating Supply Current=475uA, Operating Supply Voltage=18V, Packaging="Tape and Reel", Pricing 1="1=1.36, 10=1.215, 100=0.9476, 500=0.7828, 1000=0.618 (USD)", Radiation Hardening=No, REACH SVHC="No SVHC", Slew Rate=1.5V/µs, Stock 1=126525, Supplier 1=Digi-Key, Unity Gain Bandwidth Product=3MHz
U38: library part "IC PCA9632TK,118 LED DRVR LIN DIM 25MA 8HVSON", "LED Driver IC 4 Output Power Switch  PWM Dimming 25mA 8-HVSON (3x3)", Frequency=400kHz, Low Level Output Current=100mA, Manufacturer="NXP Semiconductors", Max Operating Temperature=85°C, Max Power Dissipation=400mW, Max Supply Current=108uA, Max Supply Voltage=5.5V, Min Operating Temperature=-40°C, Min Supply Voltage=2.3V, Nominal Supply Current=150uA, Package Quantity=1, Supplier Part Number 1=568-8715-1-ND, 7B-I2C_ADDR="0b1100010 (0x62)", ComponentLink1Description=http://www.nxp.com/documents/data_sheet/PCA9632.pdf?src-supplier=Digi-Key, ComponentLink1URL=http://www.nxp.com/documents/data_sheet/PCA9632.pdf?src-supplier=Digi-Key, ComponentLink2Description=https://www.nxp.com/docs/en/brochure/75016950.pdf?src-supplier=Digi-Key, ComponentLink2URL=https://www.nxp.com/docs/en/brochure/75016950.pdf?src-supplier=Digi-Key, ComponentLink3Description=http://www.classic.nxp.com/documents/data_sheet/PCA9632.pdf?src-supplier=Avnet+Europe, ComponentLink3URL=http://www.classic.nxp.com/documents/data_sheet/PCA9632.pdf?src-supplier=Avnet+Europe, Contact Plating=Gold, Lead Free="Lead Free", Manufacturer Part Number=PCA9632TK,118, Mount="Surface Mount", Number of Outputs=4, Number of Pins=8, Number of Segments=4, Output Voltage=5.5V, Packaging="Tape and Reel", Power Dissipation=400mW, Pricing 1="1=1.33, 10=1.192, 25=1.1312, 100=0.8686, 250=0.7676, 500=0.7272, 1000=0.5656, 2500=0.5373 (USD)", Radiation Hardening=No, Stock 1=2394, Supplier 1=Digi-Key
U39: library part "IC TS3USBCA410IRSVT SBU MUX 3TO1 W/ MIC AND GNDIND T", "USB Switch IC 1 Channel 16-UQFN (2.6x1.8)", Manufacturer="Texas Instruments", Max Operating Temperature=85°C, Min Operating Temperature=-40°C, Supplier Part Number 1=296-52158-1-ND, ComponentLink1Description=Datasheet, ComponentLink1URL=https://www.ti.com/lit/gpn/ts3usbca4, Manufacturer Part Number=TS3USBCA410IRSVT, Mount="Surface Mount", Number of Channels=3, Pricing 1="1=1.07, 10=0.959, 25=0.91, 100=0.6988 (USD)", Stock 1=250, Supplier 1=Digi-Key
U40: library part "IC LDLN025 REG LINEAR 1.8V 250MA 4DFN", "Linear Voltage Regulator IC 1 Output 250mA 4-DFN (1x1)", Case/Package=DFN, Dropout Voltage=250mV, Manufacturer=STMicroelectronics, Max Input Voltage=5.5V, Max Operating Temperature=125°C, Max Supply Current=425uA, Min Operating Temperature=-40°C, Min Output Voltage=1.8V, Output Current=250mA, Power Supply Rejection Ratio (PSRR)=60dB, Quiescent Current=25uA, Supplier Part Number 1=497-17000-1-ND, ComponentLink1Description=http://www.st.com/content/ccc/resource/technical/document/datasheet/group3/a7/8d/6a/ac/ed/d0/4f/f4/DM00312779/files/DM00312779.pdf/jcr:content/translations/en.DM00312779.pdf?src-supplier=Digi-Key, ComponentLink1URL=http://www.st.com/content/ccc/resource/technical/document/datasheet/group3/a7/8d/6a/ac/ed/d0/4f/f4/DM00312779/files/DM00312779.pdf/jcr:content/translations/en.DM00312779.pdf?src-supplier=Digi-Key, Manufacturer Part Number=LDLN025PU18R, Mount="Surface Mount", Number of Regulators=1, Output Configuration=Positive, Output Type=Fixed, Packaging="Tape and Reel", Pricing 1="1=0.61, 10=0.525, 25=0.49, 100=0.364, 250=0.308, 500=0.294, 1000=0.217, 2500=0.203 (USD)", Stock 1=4322, Supplier 1=Digi-Key
U41: library part "IC BMA253 ACCEL 2-16G I2C/SPI 12LGA", "Accelerometer X, Y, Z Axis ±2g, 4g, 8g, 16g 8Hz ~ 1kHz 12-LGA (2x2)", Case/Package=LGA, Manufacturer="Bosch Sensortec", Max Operating Temperature=85°C, Min Operating Temperature=-40°C, Supplier Part Number 1=828-1071-1-ND, Axis="X, Y, Z", Bandwidth=8Hz, ComponentLink1Description=https://ae-bst.resource.bosch.com/media/_tech/media/application_notes/BST-MAS-HS000-05.pdf?src-supplier=Digi-Key, ComponentLink1URL=https://ae-bst.resource.bosch.com/media/_tech/media/application_notes/BST-MAS-HS000-05.pdf?src-supplier=Digi-Key, ComponentLink2Description=https://ae-bst.resource.bosch.com/media/_tech/media/application_notes/BST-MAS-HS000.pdf?src-supplier=Digi-Key, ComponentLink2URL=https://ae-bst.resource.bosch.com/media/_tech/media/application_notes/BST-MAS-HS000.pdf?src-supplier=Digi-Key, Manufacturer Part Number=BMA253, Mount="Surface Mount", Number of Pins=12, Output Type=SPI,I2C, Packaging="Tape and Reel", Pricing 1="1=1.73, 5=1.666, 10=1.353, 25=1.1656, 50=1.0094, 100=0.9158, 500=0.7701, 1000=0.6868, 5000=0.63 (USD)", Stock 1=49895, Supplier 1=Digi-Key
X1 X2 X9 X10: library part TC2030-IDC-NL, "Tag-Connect TC2030-MCP-NL (3x2 pins No Legs)", Manufacturer="Tag-Connect LLC", Manufacturer Part Number=TC2030-IDC-NL
X3: library part "CRYSTAL 32.768KHZ 6PF SMD", "32.768kHz  Crystal 6pF 70 kOhms 2-SMD, No Lead", Case/Package=SMD/SMT, ESR (Equivalent Series Resistance)=70kR, Frequency=32.768kHz, Load Capacitance=6pF, Manufacturer=NDK, Max Operating Temperature=85°C, Min Operating Temperature=-40°C, Ratings=AEC-Q200, Supplier Part Number 1=644-1386-1-ND, ClassName=STM32G473CETx, Manufacturer Part Number=NX3215SA-32.768KHZ-EXS00A-MU00525, Mount="Surface Mount", Packaging="Tape and Reel", Pricing 1="1=0.68, 10=0.602, 50=0.5628, 100=0.4974, 500=0.4712, 1000=0.3927 (USD)", Stock 1=5687, Supplier 1=Digi-Key
X5: library part "CONN 686108183522 FFC BTM 8POS 1MM SMD R/A", "8 Position FFC Connector Contacts, Bottom 0.039\" (1.00mm) Surface Mount, Right Angle", Contact Resistance=30mOhm, Current Rating=800mA, Flammability Rating="UL94 V-0", Housing Color=Beige, Manufacturer="Wurth Electronics", Manufacturer Part Number=686108183522, Max Operating Temperature=85°C, Min Operating Temperature=-25°C, Operating Temperature="-25 to +85degC", Rated Current=0.8A, Supplier Part Number 1=732-11328-1-ND, Working Voltage=50VAC, Actuator Material=Nylon,Polyamide, ComponentLink1Description=Manufacturer, ComponentLink1URL=http://www.we-online.de, ComponentLink2Description=Datasheet, ComponentLink2URL=https://katalog.we-online.com/em/datasheet/686108183522.pdf, ComponentLink3Description=https://katalog.we-online.de/em/datasheet/686108183522.pdf?src-supplier=Digi-Key, ComponentLink3URL=https://katalog.we-online.de/em/datasheet/686108183522.pdf?src-supplier=Digi-Key, Contact Material=Bronze, Contact Plating=Tin, Housing Material=Polymer, Length=14.2mm, Mating Cycles=20, Mount="Surface Mount", Mounting Technology=SMT, Number of Positions=8, Packaging="Tape and Reel", Part Number=686108183522, pin_1=KEY_1, pin_2=KEY_2, pin_3=KEY_3, pin_4=KEY_4, pin_5=KEY_5, pin_6=KEY_6, pin_7=KEY_7, pin_8=GND, pin_MP1=MP1, pin_MP2=MP2, Pin Number=8, Pitch=1mm, Pricing 1="1=1.5, 10=1.35, 100=1.15, 1000=1.05 (USD)", Published Date="November 2019", Publisher="Wurth Elektronik", Stock 1=2013, Supplier 1=Digi-Key, Termination=Solder, Type=Horizontal, Wire/Cable Type=Straight
X6 X7: library part "CONN U.FL RCPT STR 50 OHM SMD", "U.FL (UMCC) Connector Receptacle, Male Pin 50Ohm Surface Mount Solder", Dielectric Material=Polymer, Frequency=6GHz, Housing Color=Beige, Insulation Resistance=500MR, Manufacturer=Hirose, Max Operating Temperature=90°C, Min Operating Temperature=-40°C, Package Quantity=2500, Supplier Part Number 1=H11891CT-ND, Body Material=Bronze, Body Plating=Silver, ClassName=P109, ComponentLink1Description=http://www.farnell.com/datasheets/91524.pdf?src-supplier=Element14, ComponentLink1URL=http://www.farnell.com/datasheets/91524.pdf?src-supplier=Element14, ComponentLink2Description=http://uk.rs-online.com/webdocs/1363/0900766b81363563.pdf?src-supplier=RSComponents, ComponentLink2URL=http://uk.rs-online.com/webdocs/1363/0900766b81363563.pdf?src-supplier=RSComponents, ComponentLink3Description=http://www.farnell.com/datasheets/2691132.pdf?src-supplier=Element14, ComponentLink3URL=http://www.farnell.com/datasheets/2691132.pdf?src-supplier=Element14, Connector Type="Coaxial,Receptacle,Male Pin", Contact Material=Brass,Bronze, Contact Plating=Gold, Depth=3.1mm, Fastening Type=Snap, Gender=Male, Impedance=50R, Lead Free="Lead Free", Length=3mm, Manufacturer Part Number=U.FL-R-SMT-1(10), Max Frequency=6GHz, Mount="Surface Mount", Orientation=Straight, Packaging="Tape and Reel", Pricing 1="1=1.31, 10=1.15, 25=1.0824, 50=1.0374, 100=0.9922, 250=0.902, 500=0.8118, 1000=0.7216 (USD)", Radiation Hardening=No, REACH SVHC="No SVHC", Stock 1=19543, Supplier 1=Digi-Key, Termination=Solder, Wire/Cable Type=Coaxial
X8: library part TC2050-IDC-NL-JTAG, "A connection to Plug-Of-Nails™ Adapter Cable"
Logo1: ClassName=PCB_FEATURE

## Via types
v1: diameter 19.68, hole 5.91, 1-SIG-TOP to 6-GND-BOT, tented both sides, 1553 vias
v2: diameter 23.81, hole 11.81, 1-SIG-TOP to 6-GND-BOT, tented both sides, 27 vias
v3: diameter 23.82, hole 11.81, 1-SIG-TOP to 6-GND-BOT, tented both sides, 26 vias
v4: diameter 21.65, hole 7.87, 1-SIG-TOP to 6-GND-BOT, tented both sides, 4 vias

## Nets (pads, with @x,y where several pads share a name; then routed paths per layer and width w, separated by ;. In a path a pad name is that pad's centre, name@x,y a point inside that pad or via, vN(x,y) a via of type N, cw(c..) or ccw(c..) an arc to the next point about the centre after c; other vN are vias at no path point)
16x_IO1_A0: J2.1 J3.2 U28.18 | length 151.6
  1-SIG-TOP w6: U28.18@2499.21,700.2 2499.21,690.79 2513.66,676.34 2513.66,626.34 v1(2515,625)
  6-GND-BOT w6: J3.2@2477.56,625 v1(2515,625) J2.1@2547.44,625
16x_IO1_A1: J4.1 J5.2 U28.23 | length 222.5
  1-SIG-TOP w6: U28.23@2524.8,804.53 2629.53,804.53 v1(2635,810)
  6-GND-BOT w8: J4.1@2600,752.56 J5.2@2600,822.44 2607.56,822.44 2620,810 v1(2635,810)
16x_IO2_A0: J6.1 J7.2 U29.18 | length 156.8
  1-SIG-TOP w6: v1(2260,1885) 2275.79,1869.21 U29.18@2275.79,1849.8
  6-GND-BOT w6: J6.1@2202.56,1925 J7.2@2272.44,1925 2272.44,1897.44 v1(2260,1885)
16x_IO2_A1: J8.1 J9.2 U29.23 | length 359.9
  1-SIG-TOP w6: v1(2225,1745) 2249.72,1745 U29.23@2250.2,1745.47
  5-SIG-VERT w6: v1(2205,1970) 2210,1965 2210,1867.34 2209.2,1866.54 2209.2,1853.46 2210,1852.66 2210,1792.18 2209.2,1791.39 2209.2,1778.3 2210,1777.5 2210,1760 v1(2225,1745)
  6-GND-BOT w6: v1(2205,1970) 2202.56,1972.44 J8.1@2202.56,2000 J9.2@2271.44,2000
16x_IO3_A0: J10.1 J11.2 U30.18 | length 178.5
  1-SIG-TOP w6: U30.18@1024.8,1299.21 1042.76,1299.21 1061.97,1280 v1(1110,1280)
  6-GND-BOT w6: J10.1@1075,1267.56 1097.56,1267.56 v1(1110,1280) 1122.44,1267.56 J11.2@1150,1267.56
16x_IO3_A1: J12.1 J13.2 U30.23 | length 149.8
  1-SIG-TOP w6: v1(905,1355) 908.68,1355 920.47,1343.2 U30.23@920.47,1324.8
  6-GND-BOT w6: J12.1@902.56,1465 J13.2@902.56,1390 902.56,1357.44 v1(905,1355)
+1V8: C39.2 C146.2 Q9.3 Q9.6 R76.2 R77.2 TP13.1 U40.1 | length 910
  1-SIG-TOP w6: U40.1@1717.91,2646.65 1719.69,2648.43 C146.2@1719.69,2680 1725,2685.32 v1(1725,2705)
  5-SIG-VERT w6: v1(3160,2060) 3149.16,2070.84 3149.16,2126.99 3173,2150.83 3173,2381.48 3160,2394.48 v1(3160,2675)
  6-GND-BOT w6: C39.2@3050,2005.32 3055.51,1999.8 Q9.3@3105.32,1999.8 3105.32,2011.94 3118.37,2025 3131.63,2025 3144.68,2038.06 Q9.6@3144.68,2050.2 3144.68,2058.5 3163.5,2058.5 3162,2060 v1(3160,2060)
  6-GND-BOT w10: R77.2@565,2669.68 v1(565,2695) ; R76.2@965,2669.68 v1(965,2695)
+1V8_BG95: C23.2 C24.2 C67.2 C69.2 R53.1 U6.29 U18.5 U19.5 | length 292.6
  1-SIG-TOP w6: U19.5@2560.43,1642.13 2597.87,1642.13 2599.18,1640.82 v1(2599.18,1639.18) ; U18.5@3082.87,1410.43 3082.87,1447.87 3085,1445.75 v1(3085,1450)
  1-SIG-TOP w10: v1(3270,1555) 3269.88,1555.12 U6.29@3269.88,1591.93 3269.88,1629.88 v1(3270,1630)
  6-GND-BOT w6: C69.2@2575,1640.32 2599.68,1640.32 2599.18,1639.81 v1(2599.18,1639.18) ; C67.2@3084.68,1425 3084.68,1449.68 3085,1449.37 v1(3085,1450)
  6-GND-BOT w10: R53.1@3244.68,1560 3265,1560 v1(3270,1555) 3275,1560 C24.2@3295.32,1560 ; v1(3270,1630) C23.2@3295.32,1630
+3V3: C9.2 C10.2 C16.2 C41.2 C42.2 C43.2 C44.1 C45.1 C56.2 C64.1 C65.2 C66.2 C68.1 C70.1 C71.2 C72.2 C75.2 C76.2 C77.2 C78.2 C79.1 C80.1 C81.1 C82.1 C88.2 C98.1 C99.1 C100.1 C102.1 C103.1 C112.2 C113.1 C114.1 C115.1 C116.1 C117.1 C118.1 C119.1 C121.1 C124.1 C139.2 C140.2 C141.2 C142.2 C143.1 C144.1 C145.2 C147.2 C148.1 ESP32_MOD.2 FB5.2 J2.2 J4.2 J6.2 J8.2 J10.2 J12.2 L3.2 LD1.A NT3.2 OLED.6 OLED.9 P22.3 P102.4 Q1.2 Q1.5 R4.1 R5.2 R6.2 R7.1 R8.1 R9.1 R10.1 R11.1 R12.1 R13.1 R14.1 R15.1 R16.1 R17.1 R21.1 R24.1 R28.1 R60.1 R64.2 R65.2 R66.2 R67.2 R68.1 R69.1 R81.2 R101.2 R103.9 R103.10 R103.11 R103.12 R103.13 R103.14 R103.15 R103.16 R116.1 R119.1 R121.1 R129.2 R130.1 R141.1 R142.1 R143.1 R144.9 R144.10 R144.11 R144.12 R144.13 R144.14 R144.15 R144.16 R154.2 R155.2 R156.1 TFT.3 TFT.4 TFT.6 TP14.1 U11.5 U12.5 U15.3 U16.12 U17.12 U18.16 U19.16 U20.15 U20.16 U22.6 U22.7 U23.10 U26.16 U26.32 U26.48 U26.64 U27.8 U28.21 U29.21 U30.21 U31.20 U33.6 U34.8 U38.8 U39.1 U40.4 U41.3 U41.7 X1.1 X2.1 X8.1 X9.1 X10.1 | length 7329
  1-SIG-TOP w6: R119.1@145.31,1080 v1(145.31,1100) R116.1@145.31,1120 ; C77.2@233.46,1275 263.15,1304.68 v1(275,1304.68) ; C76.2@233.46,1335 243.46,1345 v1(280,1345) ; R67.2@350,1769.68 374.69,1769.68 v1(375,1770) ; v1(400,1900) 400,1885 406.1,1878.9 R103.16@406.1,1876.1 ; R103.16@406.1,1857.5 R103.16@406.1,1876.1 ; R103.15@425.79,1857.5 425.79,1884.21 425,1885 ; R103.14@445.47,1857.5 445.47,1884.53 445,1885 ; R103.13@465.16,1857.5 465.16,1884.84 465,1885 ; v1(480,2445) R12.1@505.31,2445 R13.1@505.31,2405 ; R103.12@484.84,1857.5 484.84,1884.84 485,1885 ; R103.11@504.53,1857.5 504.53,1884.53 505,1885 ; U17.12@523.62,1193.5 523.62,1186.38 v1(540,1170) C66.2@540,1144.68 ; R103.10@524.21,1857.5 524.21,1884.21 525,1885 ; R103.9@543.9,1857.5 543.9,1881.1 540,1885 525,1885 ; R66.2@634.69,1735 634.69,1764.68 645,1775 C124.1@665.31,1775 ; U34.8@665.96,1820.47 665,1819.51 v1(665,1800) 665,1776.61 665.96,1775.65 C124.1@665.31,1775 ; R65.2@675.31,1735 665.31,1745 C124.1@665.31,1775 ; U39.1@698.62,1054.53 698.62,1083.62 v1(700,1085) C144.1@700,1105.32 C143.1@740,1105.32 ; R121.1@720,910.32 720.31,910 v1(750,910) ; R10.1@830.31,1590 830.31,1554.68 v1(835,1550) ; R11.1@894.69,1850 v1(894.69,1874.68) v1@895,1875 ; U30.21@959.84,1324.8 959.84,1349.84 v1(960,1350) 960,1379.68 C118.1@960.31,1380 C117.1@960.31,1420 ; R16.1@995.31,1740 995.31,1700.63 R64.2@994.69,1700 1020,1700 v1(1025,1705) ; U15.3@1254.53,1435.93 1254.53,1459.53 1260,1465 ; R142.1@1319.69,1715 1319.69,1714.92 1344.92,1714.92 v1(1345,1715) ; R143.1@1344.69,2110 1360.75,2110 v1(1380,2090.75) ; R141.1@1350,1829.68 1360.31,1840 v1(1385,1840) ; R155.2@1400,2669.68 1400,2690 1440,2690 ; R154.2@1440,2669.68 1440,2690 ; R5.2@1475,2305.32 1475,2290 1485,2280 v1(1515,2280) R6.2@1515,2305.32 ; R156.1@1480,2669.68 1480,2690 ; U31.20@1487.6,2470.47 1524.84,2470.47 ; v1(1505,2690) 1480,2690 ; 1525,2470.32 1524.84,2470.47 ; C119.1@1549.84,2470.47 1524.84,2470.47 ; v1(1550,1920) 1570.98,1920 U26.32@1577.36,1926.38 ; U40.4@1717.91,2603.35 1719.69,2601.57 C145.2@1719.69,2570 v1(1745,2570) ; R14.1@1775,530.32 1785.31,520 v1(1810,520) ; R17.1@2029.69,1395 v1(2055,1395) ; U38.8@2429.53,2293.9 U38.8@2429.53,2290.94 2429.53,2285.47 2435,2280 v1(2465,2280) 2485.32,2280 C140.2@2490.32,2285 C139.2@2490.32,2325 ; v1(2440,1635) 2453.03,1635 2460.16,1642.13 U19.16@2489.57,1642.13 ; v1(2485,1125) 2485.82,1125 NT3.2@2497.86,1112.97 ; U41.3@2559.84,1052.91 2559.84,1015.16 v1(2565,1010) C148.1@2590.32,1010 ; R15.1@2575,884.68 v1(2575,910) ; U41.7@2579.53,1117.09 2587.44,1125 v1(2605,1125) C147.2@2630.32,1125 ; R9.1@2785,644.68 R7.1@2825,644.68 2825,684.68 R8.1@2824.68,685 2825,685.32 v1(2825,735) ; v1(3080,1005) 3104.68,1005 R68.1@3105,1005.32 R69.1@3145,1005.32 ; U18.16@3082.87,1339.57 3082.87,1302.13 v1(3090,1295) ; TFT.4@3100.39,511.81 3100.39,530.39 v1(3110,540) 3120.08,529.92 TFT.3@3120.08,511.81 ; U16.12@3148.62,1143.5 3148.62,1136.38 3160,1125 v1(3170,1125) ; R103.16@406.1,1876.1 415,1885 425,1885 ; 425,1885 445,1885 ; 445,1885 465,1885 ; 465,1885 485,1885 ; 485,1885 505,1885 ; 505,1885 525,1885 ; 1440,2690 1480,2690
  1-SIG-TOP w8: C99.1@1475,1494.68 1469.09,1500.59 1475,1506.5 v1(1475,1525) 1475,1528.19 1469.09,1534.09 1487.36,1552.36 U26.48@1498.62,1552.36 ; C103.1@1519.69,1950 v1(1550,1950) 1570,1950 1577.36,1942.64 U26.32@1577.36,1926.38 ; P22.3@1675,182.68 1675,311.94 1699.84,336.78 1699.84,353.22 1690,363.06 v1(1690,520) ; U26.64@1872.64,1473.62 1872.64,1457.36 1885,1445 v1(1890,1445) 1915.31,1445 1920.31,1450 1925.31,1445 C100.1@1930.31,1450 ; U26.16@1951.38,1847.64 1967.64,1847.64 1975,1855 v1(1975,1875) C102.1@1975,1905.32 ; C115.1@2194.69,1825 C116.1@2194.69,1785 2194.84,1784.84 v1(2225,1784.84) U29.21@2250.2,1784.84 ; U28.21@2524.8,765.16 2580.16,765.16 C114.1@2580.32,765 C113.1@2580.32,725
  1-SIG-TOP w10: U33.6@2041.34,2600.6 2041.94,2600 v1(2070,2600) 2087.44,2600 C121.1@2092.44,2605 ; v1(3062.5,466.18) 3062.5,492.5 3060,495 3060,540.52 3050,550.52 v1(3050,555) C80.1@3050,585.32 3079.68,585.32 3085.91,591.54 C79.1@3105,591.54 3110,591.54 v1(3110,540)
  1-SIG-TOP w15: C41.2@330,2233.46 340,2245 v1(350,2255) ; v1(385,2255) 390,2250 C42.2@390,2233.46 C42.2@390,2227.56 ; v1(480,2155) R60.1@480,2180.32 ; C71.2@3719.68,625 v1(3745,625)
  4-SIG-HOR w6: v1(1350,710) v1(1625,710)
  4-SIG-HOR w15: v1(3275,615) 3275.34,614.66 3329.66,614.66 3340,625 v1(3745,625)
  5-SIG-VERT w6: v1(1505,2690) 1504.16,2689.16 1504.16,2475.84 v1(1510,2470)
  6-GND-BOT w6: v1(205,1580) 206.5,1578.5 LD1.A@206.5,1552.72 ; U22.7@300.94,1358.5 300.94,1350.94 295,1345 v1(280,1345) 267.5,1332.5 267.5,1317.5 255,1305 C75.2@255,1304.68 v1(275,1304.68) C78.2@295,1304.68 295,1310 v1(310,1325) 320.63,1335.63 U22.6@320.63,1358.5 ; R28.1@444.69,2625 444.69,2654.68 v1(445,2655) ; U23.10@556.5,709.06 556.5,721.5 v1(570,735) C88.2@570,755.32 ; v1(560,845) R129.2@560,865.32 ; U12.5@704.53,2475.98 724.02,2475.98 v1(725,2475) 744.69,2475 C45.1@750,2480.32 ; v1(825,1460) 842.44,1460 J12.2@847.44,1465 ; v1(935,1060) 955,1060 ; R144.16@956.1,1027.5 956.1,1058.9 955,1060 ; R144.15@975.79,1027.5 975.79,1059.21 975,1060 ; R144.14@995.47,1027.5 995.47,1059.53 995,1060 ; R144.13@1015.16,1027.5 1015.16,1059.84 1015,1060 ; R144.12@1034.84,1027.5 1034.84,1059.84 1035,1060 ; R144.11@1054.53,1027.5 1054.53,1055.47 1050,1060 ; R144.10@1074.21,1027.5 1074.21,1059.21 1075,1060 ; J10.2@1075,1212.44 1080,1207.44 v1(1080,1190) ; R144.9@1093.9,1027.5 1093.9,1056.1 1090,1060 1075,1060 ; U11.5@1104.53,2475.98 1124.02,2475.98 v1(1125,2475) 1144.69,2475 C44.1@1150,2480.32 ; v1(1350,710) Q1.2@1350,675.2 Q1.5@1350,624.8 1350,589.68 R21.1@1330,569.68 R24.1@1370,569.68 ; R101.2@1350,1469.68 v1(1350,1500) ; U27.8@1350,2090.75 v1(1380,2090.75) 1421.06,2090.75 C112.2@1425,2094.68 ; v1(1550,1920) 1525.43,1920 C98.1@1510.43,1935 1525.43,1950 v1(1550,1950) ; v1(1560,1750) 1580.31,1750 FB5.2@1585.31,1745 ; R4.1@1620,494.68 v1(1620,520) ; v1(1922.13,1530.48) 1922.13,1528.5 1925.31,1525.32 R130.1@1925.31,1550 ; J6.2@2147.44,1925 v1(2147.44,1962.5) J8.2@2147.44,2000 ; X8.1@2150,2125 v1(2150,2090.16) 2165.16,2075 C56.2@2180.31,2075 ; v1(2440,1635) 2445.32,1640.32 C70.1@2475,1640.32 ; J4.2@2600,697.44 2600,627.56 J2.2@2602.56,625 ; OLED.6@2809.84,1116.14 2871.14,1116.14 v1(2875,1120) ; OLED.9@2809.84,1198.82 2811.02,1200 v1(2875,1200) C82.1@2905.32,1200 2905,1200.32 2905,1238.46 C81.1@2916.54,1250 ; C68.1@3084.68,1325 3084.68,1300.32 v1(3090,1295) ; C65.2@3144.68,1115 3145,1115 3155,1125 v1(3170,1125) ; C72.2@3244.68,575 3244.68,594.68 v1(3250,600) 3247.64,602.36 U20.16@3247.64,619.88 ; U20.15@3247.64,635.63 3254.37,635.63 v1(3275,615) ; 955,1060 975,1060 ; 975,1060 995,1060 ; 995,1060 1015,1060 ; 1015,1060 1035,1060 ; 1035,1060 1050,1060 ; 1050,1060 1075,1060
  6-GND-BOT w8: C16.2@1675,119.68 P22.3@1675,182.68 ; R81.2@1810,484.68 v1(1810,520) ; X10.1@2050,775 v1(2050,735) 2050,705.32 C142.2@2055.31,700 ; X1.1@2050,1000 v1(2050,960) 2050,930.32 C9.2@2055.31,925 ; X9.1@2050,1225 v1(2050,1185) 2050,1155.32 C141.2@2055.31,1150 ; X2.1@2050,2350 v1(2050,2310) 2050,2280.32 C10.2@2055.31,2275 ; J2.2@2602.56,625 v1(2635,625)
  6-GND-BOT w15: v1(350,2255) ESP32_MOD.2@367.91,2272.91 ; C43.2@359.69,2390 359.69,2371.14 v1(367.91,2362.91) ESP32_MOD.2@367.91,2309.65 ESP32_MOD.2@367.91,2272.91 ; v1(385,2255) 367.91,2272.09 ESP32_MOD.2@367.91,2272.91 ; v1(3745,625) 3746.38,623.62 P102.4@3789.37,623.62